# Altium PCB BaseNode.PcbDoc (part 1 of 3)
Units mil, origin at the board's own origin, x right, y up, seen from the top; angles counter-clockwise.
Board outline 2200 x 2870 mil, 2 copper layers (Top Layer, Bottom Layer), stack 65.8 mil thick; 93 components, 79 nets, 344 pads, 79 vias.
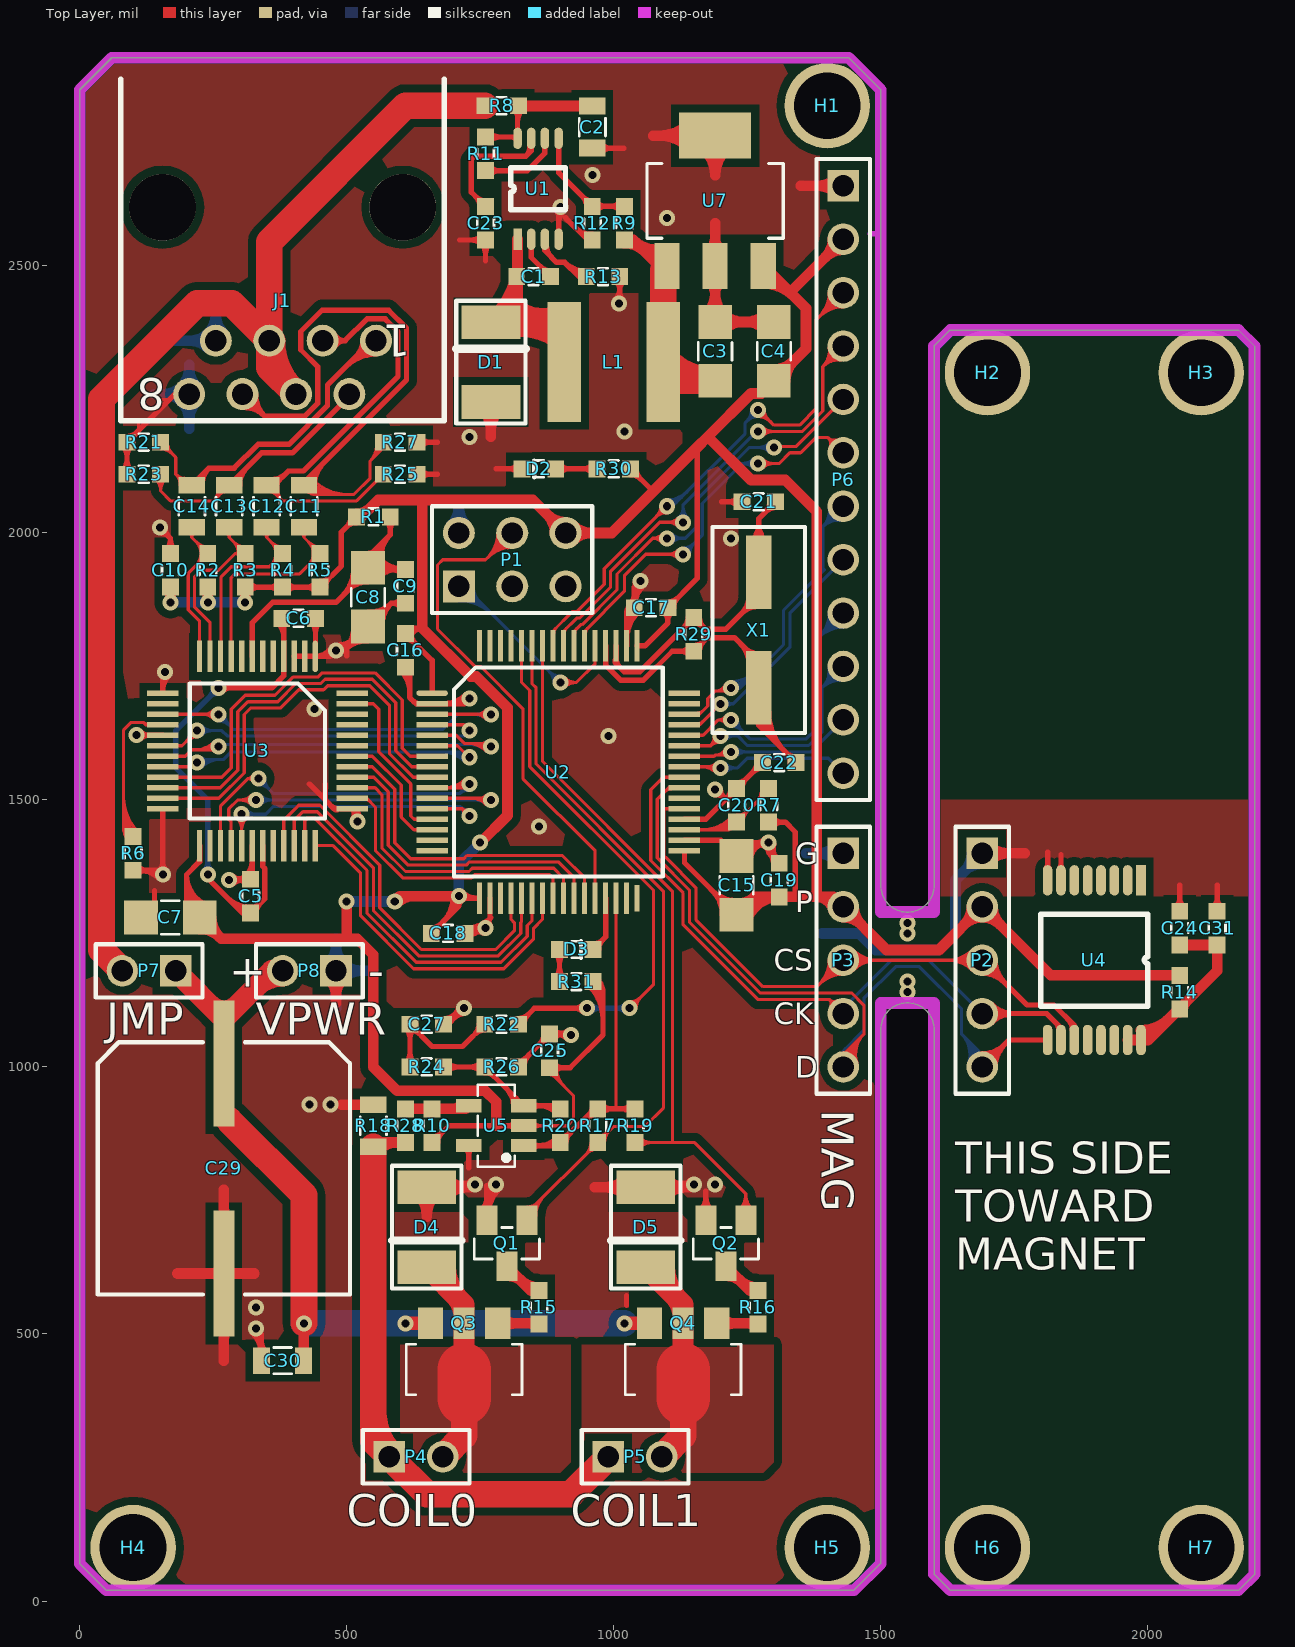
[diagram p0: Top Layer view]
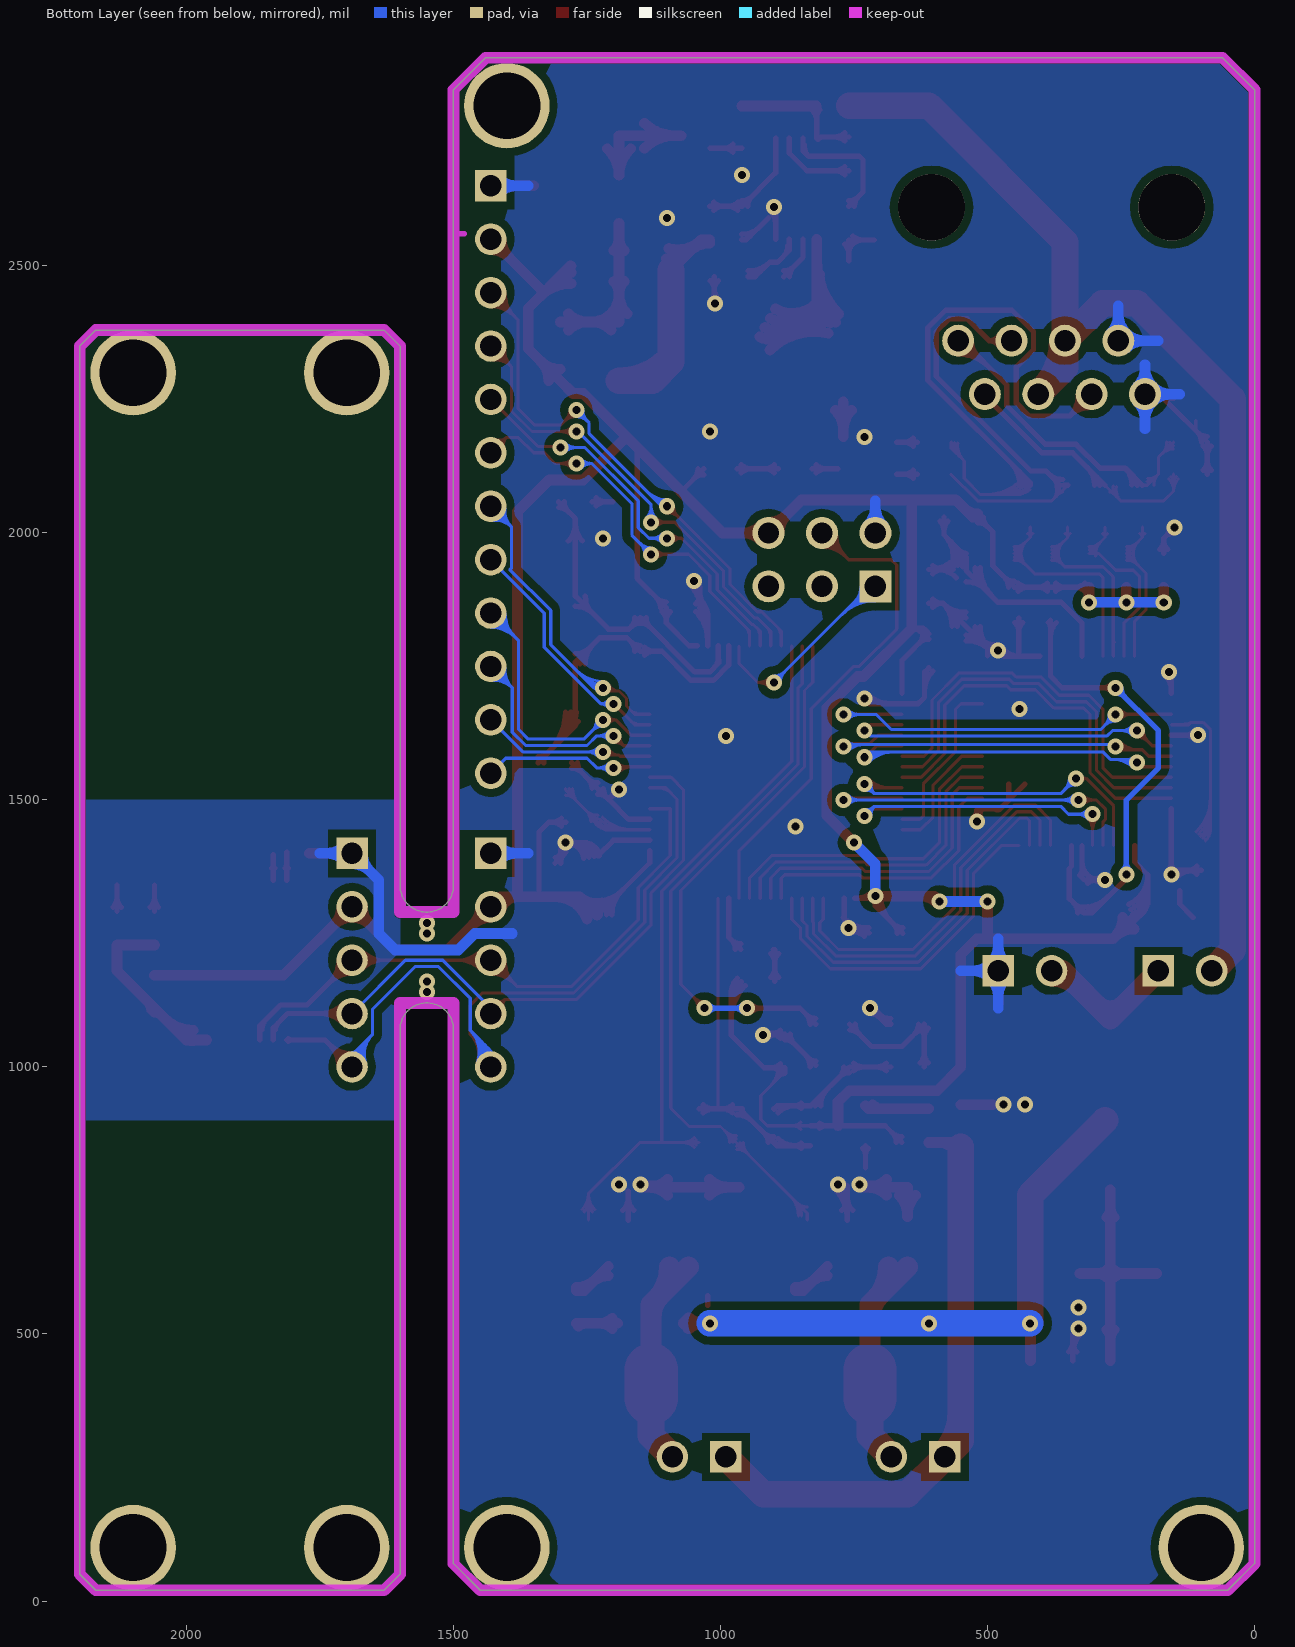
[diagram p1: Bottom Layer view, seen from below]

## Layer stack, top to bottom
Top Layer: signal copper 1.4
Dielectric: core 63, FR-4, Dk 4.8
Bottom Layer: signal copper 1.4

## Board outline
50,20 0,70 0,2830 60,2890 1440,2890 1500,2830 1500,1340 ccw(c1550,1340) 1600,1340 1600,2350 1630,2380 2170,2380 2200,2350 2200,50 2170,20 1630,20 1600,50 1600,1070 ccw(c1550,1070) 1500,1070 1500,70 1450,20

## Design rules (kind name [scope] priority, off if disabled: settings)
AcuteAngle [All] p1: minimum=4.50000000000000E+0001 checktracksonly=FALSE
Clearance KEEPOUT [OnLayer('Keep-Out Layer')] p1: gap=1
Clearance POLY-STUFF [inpoly] p2: gap=15
Clearance [All] p3: gap=6
ComponentClearance [All] p1: gap=1 collisioncheckmode=3 verticalgap=1 showdistances=FALSE
HoleSize [All] p1: absolutevalues=TRUE maxlimit=500 minlimit=10 maxpercent=80.000 minpercent=20.000
MinimumSolderMaskSliver [All] p1: minsoldermaskwidth=3
PolygonConnect PolygonConnect_1 [isvia] p1: connectstyle=Direct reliefconductorwidth=10 reliefentries=4 polygonreliefangle="90 Angle"
PolygonConnect [All] p2: connectstyle=NoConnect reliefconductorwidth=10 reliefentries=4 polygonreliefangle="90 Angle"
RoutingVias [All] p1: holewidth=15 width=30 viastyle="Through Hole" minholewidth=10 minwidth=10 maxholewidth=500 maxwidth=500
SilkscreenOverComponentPads [All] p1: minsilkscreentomaskgap=3
SolderMaskExpansion [All] p1: expansion=2
Width [All] p1: maxlimit=100 minlimit=6 preferedwidth=10 checkconnectedcopper=TRUE
24 further rules are at their usual default settings.

## Components (designator, comment, footprint, x,y, rotation, side; value= is the part's Value field where it differs from the comment)
C1 "0.1uF 25V" 0603 850,2480 r180 top
C2 "1uF 100V" 0805 960,2760 r90 top
C3 "22uF 6.3V" 1206 1190,2340 r270 top
C4 "22uF 6.3V" 1206 1300,2340 r270 top
C5 "2.2uF 10V" 0603 320,1320 r270 top
C6 "2.2uF 10V" 0603 410,1840 r180 top
C7 "22uF 6.3V" 1206 170,1280 r0 top
C8 "22uF 6.3V" 1206 540,1880 r90 top
C9 "0.1uF 25V" 0603 610,1900 r90 top
C10 "0.1uF 25V" 0603 170,1930 r270 top
C11 "33nF 250V" 0805 420,2050 r270 top
C12 "33nF 250V" 0805 350,2050 r270 top
C13 "33nF 250V" 0805 280,2050 r270 top
C14 "33nF 250V" 0805 210,2050 r270 top
C15 "22uF 6.3V" 1206 1230,1340 r270 top
C16 "0.1uF 25V" 0603 610,1780 r90 top
C17 "0.1uF 25V" 0603 1070,1860 r0 top
C18 "0.1uF 25V" 0603 690,1250 r180 top
C19 "0.1uF 25V" 0603 1310,1350 r270 top
C20 "2.2uF 10V" 0603 1230,1490 r270 top
C21 "39pF" 0603 1271.73,2058.27 r0 top
C22 "39pF" 0603 1310,1570 r0 top
C23 "0.1uF 25V" 0603 760,2580 r90 top
C24 "2.2uF 10V" 0603 2060,1260 r270 top
C25 "0.1uF 25V" 0603 880,1030 r270 top
C27 "2.2uF 10V" 0603 650,1080 r180 top
C29 "100uF 80V" "Capacitor 12mm DIA POLAR" 270,810 r90 top
C30 "1uF 100V" 0805 380,450 r0 top
C31 "2.2uF 10V" 0603 2130,1260 r270 top
D1 "CDBA140-G" SMA-DIODE 770,2320 r90 top
D2 "WP113IDT" "0603 - LED" 860,2120 r180 top
D3 "WP113GDT" "0603 - LED" 930,1220 r0 top
D4 "CDBA140-G" SMA-DIODE 650,700 r270 top
D5 "CDBA140-G" SMA-DIODE 1060,700 r270 top
H1 "MOUNT HOLE" MOUNT_HOLE 1400,2800 r0 top
H2 "MOUNT HOLE" MOUNT_HOLE 1700,2300 r0 top
H3 "MOUNT HOLE" MOUNT_HOLE 2100,2300 r0 top
H4 "MOUNT HOLE" MOUNT_HOLE 100,100 r0 top
H5 "MOUNT HOLE" MOUNT_HOLE 1400,100 r0 top
H6 "MOUNT HOLE" MOUNT_HOLE 1700,100 r0 top
H7 "MOUNT HOLE" MOUNT_HOLE 2100,100 r0 top
J1 "SS-6488-NF" SS-6488-NF 380,2610 r180 top
L1 "Inductor" "NR6028 Inductor" 1000,2320 r0 top
P1 "Header 3X2" HDR2X3 710,1900 r0 top
P2 "Header 5" HDR1X5 1690,1400 r270 top
P3 "Header 5" HDR1X5 1430,1400 r270 top
P4 "Header 2" HDR1X2 580,270 r0 top
P5 "Header 2" HDR1X2 990,270 r0 top
P6 "Header 12" HDR1X12 1430,2650 r270 top
P7 "Header 2" HDR1X2 180,1180 r180 top
P8 "Header 2" HDR1X2 480,1180 r180 top
Q1 "NFET" SOT-23 800,670 r180 top
Q2 "NFET" SOT-23 1210,670 r180 top
Q3 "#NAME?" "SOT-89 - PBSS305PX" 720,520 r180 top
Q4 "#NAME?" "SOT-89 - PBSS305PX" 1130,520 r180 top
R1 "LM4041EIM3X-1.2_1" 0603 550,2030 r0 top
R2 "51" 0603 240,1930 r270 top
R3 "51" 0603 310,1930 r270 top
R4 "51" 0603 380,1930 r270 top
R5 "51" 0603 450,1930 r270 top
R6 "6.49K" 0603 100,1400 r90 top
R7 "LM4041EIM3X-1.2_1" 0603 1290,1490 r90 top
R8 "LM4041EIM3X-1.2_1" 0603 790,2800 r0 top
R9 "3.16k" 0603 1020,2580 r270 top
R10 "1meg" 0603 660,890 r270 top
R11 "100k" 0603 760,2710 r90 top
R12 "6.49K" 0603 960,2580 r90 top
R13 "DNP" 0603 980,2480 r180 top
R14 "LM4041EIM3X-1.2_1" 0603 2060,1140 r270 top
R15 "1k" 0603 860,550 r270 top
R16 "1k" 0603 1270,550 r270 top
R17 "10k" 0603 970,890 r90 top
R18 "220m" 0805 550,890 r270 top
R19 "10k" 0603 1040,890 r90 top
R20 "1meg" 0603 900,890 r90 top
R21 "100k" 0603 120,2170 r0 top
R22 "1k" 0603 790,1080 r0 top
R23 "100k" 0603 120,2110 r0 top
R24 "100k" 0603 650,1000 r180 top
R25 "100k" 0603 600,2110 r180 top
R26 "10k" 0603 790,1000 r180 top
R27 "100k" 0603 600,2170 r180 top
R28 "3.16k" 0603 610,890 r270 top
R29 "100k" 0603 1150,1810 r270 top
R30 "51" 0603 1000,2120 r0 top
R31 "51" 0603 930,1160 r0 top
U1 "LM5007MM/NOPB" MSOP-8 820,2550 r90 top
U2 "MCF51CN128CLH" "LQFP-64 10x10mm .5mm pitch" 660,1700 r0 top locked
U3 "KSZ8051MLL" "LQFP-48 7x7mm 0.5mm pitch" 441.1,1768.9 r270 top
U4 "AS5045-ASSU" SSOP-16 1900,1200 r270 top
U5 "MIC7211YM5 TR" SOT-23-5 780,890 r180 top
U7 "TC1262-3.3VDBTR" SOT-223 1100,2500 r0 top
X1 "ECS-250-20-3X-EN-TR" CSM-3X 1271.73,1818.27 r90 top

## Footprints (in the part's own frame and the unit in brackets; to place one, negate y for a bottom-side part, rotate by r counter-clockwise, add the part's x,y. Pads: shape width x height; smd on the part's side, far side on the other; paste and mask are expansions set on the pad)
0603 [mm]
  rect 0.8x0.8 smd: 1(-0.8,0) 2(0.8,0)
  silkscreen extent -0.23,-0.4 0.23,0.4, body extent -0.8,-0.4 0.8,0.4, height 0.45
"0603 - LED" [mm]
  rect 0.8x0.8 smd: A(-0.8,0) K(0.8,0)
  silkscreen extent -0.23,-0.4 0.23,0.4, body extent -0.8,-0.4 0.8,0.4, height 0.45
0805 [mm]
  rect 0.8x1.25 smd: 1(-1,0) 2(1,0)
  silkscreen extent -0.43,-0.63 0.43,0.63, body extent -1,-0.63 1,0.63, height 1.25
1206 [mm]
  rect 1.6x1.6 smd: 1(-1.4,0) 2(1.4,0)
  silkscreen extent -0.43,-0.8 0.43,0.8, body extent -1.6,-0.8 1.6,0.8, height 1.6
"Capacitor 12mm DIA POLAR" [mm]
  rect 6x1 smd: 1(-5,0) 2(5,0)
  silkscreen extent -6,-6 6,6, body extent -6,-6 6,6, height 11
CSM-3X [mm]
  rect 3.5x1.2 smd: 1(-2.75,0) 2(2.75,0)
  silkscreen extent -4.9,-2.2 4.9,2.2
HDR1X2 [mm] "Connector; Header; 2 Position"
  rect 1.5x1.5 hole 1.016: 1(0,0)
  round 1.5 hole 1.016: 2(2.54,0)
  silkscreen extent -1.27,-1.27 3.81,1.27
HDR1X5 [mm] "Connector; Header; 5 Position"
  rect 1.5x1.5 hole 1.016: 1(0,0)
  round 1.5 hole 1.016: 2(2.54,0) 3(5.08,0) 4(7.62,0) 5(10.16,0)
  silkscreen extent -1.27,-1.27 11.43,1.27
HDR1X12 [mm] "Connector; Header; 12 Position"
  rect 1.5x1.5 hole 1.016: 1(0,0)
  round 1.5 hole 1.016: 2(2.54,0) 3(5.08,0) 4(7.62,0) 5(10.16,0) 6(12.7,0) 7(15.24,0) 8(17.78,0) 9(20.32,0) 10(22.86,0) 11(25.4,0) 12(27.94,0)
  silkscreen extent -1.27,-1.27 29.21,1.27
HDR2X3 [mil] "Connector; Header; 3x2 Position"
  rect 60x60 hole 40: 1(0,0)
  round 60 hole 40: 2(0,100) 3(100,0) 4(100,100) 5(200,0) 6(200,100)
  silkscreen extent -50,-50 250,150
"LQFP-48 7x7mm 0.5mm pitch" [mm]
  oval 1.5x0.25 smd: 1(0,0)
  rect 1.5x0.25 smd: 2(0,-0.5) 3(0,-1) 4(0,-1.5) 5(0,-2) 6(0,-2.5) 7(0,-3) 8(0,-3.5) 9(0,-4) 10(0,-4.5) 11(0,-5) 12(0,-5.5) 25(9,-5.5) 26(9,-5) 27(9,-4.5) 28(9,-4) 29(9,-3.5) 30(9,-3) 31(9,-2.5) 32(9,-2) 33(9,-1.5) 34(9,-1) 35(9,-0.5) 36(9,0)
  rect 0.25x1.5 smd: 13(1.75,-7.25) 14(2.25,-7.25) 15(2.75,-7.25) 16(3.25,-7.25) 17(3.75,-7.25) 18(4.25,-7.25) 19(4.75,-7.25) 20(5.25,-7.25) 21(5.75,-7.25) 22(6.25,-7.25) 23(6.75,-7.25) 24(7.25,-7.25) 37(7.25,1.75) 38(6.75,1.75) 39(6.25,1.75) 40(5.75,1.75) 41(5.25,1.75) 42(4.75,1.75) 43(4.25,1.75) 44(3.75,1.75) 45(3.25,1.75) 46(2.75,1.75) 47(2.25,1.75) 48(1.75,1.75)
  silkscreen extent 1.28,-5.96 7.71,0.47
"LQFP-64 10x10mm .5mm pitch" [mm]
  oval 1.5x0.25 smd: 1(0,0)
  rect 1.5x0.25 smd: 2(0,-0.5) 3(0,-1) 4(0,-1.5) 5(0,-2) 6(0,-2.5) 7(0,-3) 8(0,-3.5) 9(0,-4) 10(0,-4.5) 11(0,-5) 12(0,-5.5) 13(0,-6) 14(0,-6.5) 15(0,-7) 16(0,-7.5) 33(12,-7.5) 34(12,-7) 35(12,-6.5) 36(12,-6) 37(12,-5.5) 38(12,-5) 39(12,-4.5) 40(12,-4) 41(12,-3.5) 42(12,-3) 43(12,-2.5) 44(12,-2) 45(12,-1.5) 46(12,-1) 47(12,-0.5) 48(12,0)
  rect 0.25x1.5 smd: 17(2.25,-9.75) 18(2.75,-9.75) 19(3.25,-9.75) 20(3.75,-9.75) 21(4.25,-9.75) 22(4.75,-9.75) 23(5.25,-9.75) 24(5.75,-9.75) 25(6.25,-9.75) 26(6.75,-9.75) 27(7.25,-9.75) 28(7.75,-9.75) 29(8.25,-9.75) 30(8.75,-9.75) 31(9.25,-9.75) 49(9.75,2.25) 50(9.25,2.25) 51(8.75,2.25) 52(8.25,2.25) 53(7.75,2.25) 54(7.25,2.25) 55(6.75,2.25) 56(6.25,2.25) 57(5.75,2.25) 58(5.25,2.25) 59(4.75,2.25) 60(4.25,2.25) 61(3.75,2.25) 62(3.25,2.25) 63(2.75,2.25) 64(2.25,2.25)
  rect 0.25x1.27 smd: 32(9.75,-9.75)
  silkscreen extent 1.03,-8.71 10.96,1.22, body extent 1,-8.75 11,1.25, height 1
MOUNT_HOLE [mil]
  round 160 hole 125: 0(0,0)
MSOP-8 [mil]
  rect 40x16 smd: 1(0,0)
  oval 40x16 smd: 2(0,-25.6) 3(0,-51.2) 4(0,-76.8) 5(189,-76.8) 6(189,-51.2) 7(189,-25.6) 8(189,0)
  silkscreen extent 55,-90 134,13
"NR6028 Inductor" [mm]
  rect 1.6x5.7 smd: 1(-2.35,0) 2(2.35,0)
SMA-DIODE [mm]
  rect 1.6x2.8 smd: A(-1.9,0) K(1.9,0)
  silkscreen extent -2.92,-1.65 2.92,1.65
SOT-23 [mm] "SOT-23"
  rect 1x1.4 smd: 1(-0.95,-1.1) 2(0.95,-1.1) 3(0,1.1)
  silkscreen extent -1.55,-0.75 1.55,0.75, body extent -1.55,-1.35 1.55,1.35, height 1.3
SOT-23-5 [mm] "SOT23, 5-Leads, Body 3.1x3.0mm (max), Pitch 0.95mm, IPC High Density"
  rect 1.22x0.62 smd: 1(-1.31,0.95) 2(-1.31,0) 3(-1.31,-0.95) 4(1.31,-0.95) 5(1.31,0.95)
  silkscreen extent -0.87,-1.95 0.87,1.95, body extent -1.4,-1.95 1.4,1.95, height 1
"SOT-89 - PBSS305PX" [mm] "SOT-89"
  rect 1.2x1.5 smd: 1(1.6,0) 3(-1.6,0)
  rect 1x1.5 smd: 2(0,0)
  Top Layer lines w1: 0,1.778 0,0
  Top Layer lines w2.54: 0,3.556 0,2.2
  silkscreen extent -2.75,1 2.75,3.4, body extent -2.75,0 2.75,4.4, height 1.3
SOT-223 [mil] "SOT-223"
  rect 135x86 smd: 0(90,244)
  rect 47x86 smd: 1(0,0) 2(90,0) 3(180,0)
  silkscreen extent -38,52 218,192, body extent -38,0 218,244, height 51
SS-6488-NF [mil] "RJ45"
  round 125 hole 125: 0(-225,0) 0(225,0)
  round 60 hole 40: 1(-175,250) 2(-125,350) 3(-75,250) 4(-25,350) 5(25,250) 6(75,350) 7(125,250) 8(175,350)
  silkscreen extent -303,-240 303,400, body extent -300,-407 300,407, height 505
SSOP-16 [mil]
  rect 57x18 smd: 1(-149.5,87.5)
  oval 57x18 smd: 2(-149.5,62.5) 3(-149.5,37.5) 4(-149.5,12.5) 5(-149.5,-12.5) 6(-149.5,-37.5) 7(-149.5,-62.5) 8(-149.5,-87.5) 9(149.5,-87.5) 10(149.5,-62.5) 11(149.5,-37.5) 12(149.5,-12.5) 13(149.5,12.5) 14(149.5,37.5) 15(149.5,62.5) 16(149.5,87.5)
  silkscreen extent -86,-100 86,100, body extent -104,-122 104,122, height 79

## Part data
C1 C2 C3 C4 C5 C6 C7 C8 C9 C10 C11 C12 C13 C14 C15 C16 C17 C18 C19 C20 C21 C22 C23 C24 C25 C27 C29 C30 C31: library part Capacitor, "Capacitor"
D1 D4 D5: "DIODE SCHOTTKY 40V 1A SMA"
D2: "LED RECT 2X5MM 625NM RED DIFF"
D3: "LED RECT 2X5MM 568NM GRN DIFF"
J1: "CONN 8-8 MOD JACK"
P1: "Header, 3-Pin, Dual row"
P2 P3: "Header, 5-Pin"
P4 P5 P7 P8: "Header, 2-Pin"
P6: "Header, 12-Pin"
Q1 Q2: library part BSS123, "FET N-CH 100V 170MA SOT-23"
Q3 Q4: library part PBSS305PX,115, "TRANS PNP 80V 4A SOT89"
R1 R7 R8 R14: "Ferrite"
R2 R3 R4 R5 R6 R9 R10 R11 R12 R13 R15 R16 R17 R18 R19 R20 R21 R22 R23 R24 R25 R26 R27 R28 R29 R30 R31: library part Resistor, "Resistor"
U1: "BUCK ADJ .5A 8MSOP"
U2: "MCU Coldfire w/ Ethernet"
U3: "Ethernet PHY MII"
U4: "IC ENCODER PROG 12-BIT 16-SSOP"
U5: library part "MIC7221YM5 TR", "IC COMPARATOR R-R SOT-23-5"
U7: "Regulator IC CMOS LDO 3.3V 500MA SOT223-3"
X1: "CRYSTAL 25.00000 MHZ 20PF SMD"

## Via types
v1: diameter 30, hole 15, Top Layer to Bottom Layer, tented top, 79 vias

## Nets (pads, with @x,y where several pads share a name; then routed paths per layer and width w, separated by ;. In a path a pad name is that pad's centre, name@x,y a point inside that pad or via, vN(x,y) a via of type N, cw(c..) or ccw(c..) an arc to the next point about the centre after c; other vN are vias at no path point)
+1.2V: C5.2 C6.2 U3.4 U3.31 | length 1171
  Top Layer w10: v1(240,1360) 240,1353.23 304.73,1288.5 C5.2@320,1288.5 346.75,1315.25 346.75,1371.8 342.68,1375.87 U3.31@342.68,1414.57 ; v1(260,1710) 360,1710 382.05,1732.05 U3.4@382.05,1768.9 C6.2@382.05,1836.46 ; v1@267.07,1702.93 cw(c284.14,1685.86) 284.14,1710 cw(c284.14,1734.14) v1@267.07,1717.07 ; 275.58,1317.65 ccw(c320,1362.07) 320,1299.25 ccw(c320,1325.2) 338.35,1306.85 ccw(c356.7,1288.5) C5.2@330.75,1288.5 ; 292.65,1300.58 ccw(c320,1327.93) C5.2@320,1289.25 ; C6.2@370.9,1832.4 cw(c344,1805.5) 382.05,1805.5 ; 382.05,1822.61 cw(c395.9,1822.61) C6.2@386.1,1832.4
  Bottom Layer w10: v1@232.93,1367.07 ccw(c215.86,1384.14) 240,1384.14 ccw(c264.14,1384.14) v1@247.07,1367.07 ; v1(240,1360) 240,1500 180,1560 180,1630 v1(260,1710) ; v1@250,1710 cw(c225.86,1710) 242.93,1692.93 cw(c260,1675.86) v1@260,1700
+3.3V: C4.2 C7.2 C10.2 C15.2 C16.2 C17.2 C18.2 C19.2 C25.2 P1.6 P2.2 P3.2 P6.2 R1.1 R2.2 R3.2 R4.2 R5.2 R7.1 R10.2 R14.1 R30.2 R31.2 U2.1 U2.17 U2.33 U2.49 U3.25 U5.2 U7.3 | length 10302.6
  Top Layer w6: U5.2@831.57,890 912.73,890 924.75,902.02 924.75,946.24 C25.2@880,990.99 ; U5.2@849.89,883.49 cw(c865.61,867.78) 865.61,890 cw(c865.61,912.22) U5.2@849.89,896.51 ; C25.2@880,985.76 cw(c880,973.11) 888.94,982.05 ; C25.2@886.75,998.5 ccw(c921.17,998.5) 896.83,974.16 ; C25.2@892.75,998.5 ccw(c941.66,998.5) 907.07,963.92
  Top Layer w10: 200,1313.5 ccw(c240.27,1313.5) C7.2@223.67,1276.81 ; 200,1329 ccw(c247.28,1329) C7.2@227.8,1285.92 ; 200,1344.5 ccw(c254.29,1344.5) C7.2@231.92,1295.03 ; 220.89,1380.89 ccw(c211.81,1389.96) U3.25@224.65,1389.96 ; U3.25@224.57,1414.57 224.57,1384.57 200,1360 ; C7.2@225.12,1280 200,1305.12 200,1360 ; C7.2@236.04,1304.14 cw(c261.31,1360) 200,1360 ; R3.2@310,1898.5 R4.2@380,1898.5 R5.2@450,1898.5 490,1938.5 490,2001.5 R1.1@518.5,2030 ; R3.2@317.6,1890.9 cw(c335.95,1872.56) 335.95,1898.5 cw(c335.95,1924.45) R3.2@317.6,1906.1 ; R4.2@372.4,1890.9 ccw(c354.05,1872.56) 354.05,1898.5 ccw(c354.05,1924.45) R4.2@372.4,1906.1 ; R4.2@387.6,1890.9 cw(c405.95,1872.56) 405.95,1898.5 cw(c405.95,1924.45) R4.2@387.6,1906.1 ; R5.2@442.4,1890.9 ccw(c424.05,1872.56) 424.05,1898.5 ccw(c424.05,1924.45) R5.2@442.4,1906.1 ; R5.2@450,1909.25 ccw(c450,1935.2) 468.35,1916.85 ccw(c486.7,1898.5) R5.2@460.75,1898.5 ; R1.1@507.76,2030 cw(c481.81,2030) 500.16,2011.65 cw(c518.5,1993.3) R1.1@518.5,2019.25 ; C16.2@610,1800.75 cw(c610,1774.8) 628.35,1793.15 cw(c646.7,1811.5) C16.2@620.75,1811.5 ; C16.2@610.68,1811.19 cw(c626.35,1804.22) 626.35,1821.37 ; C16.2@619.82,1807.13 cw(c641.75,1797.37) 641.75,1821.37 619.87,1821.37 C16.2@610,1811.5 660,1761.5 U2.1@660,1700 ; C18.2@658.5,1250 710,1301.5 ; C18.2@658.5,1260.75 ccw(c658.5,1286.7) 676.85,1268.35 ccw(c695.2,1250) C18.2@669.25,1250 ; R10.2@660,858.5 691.5,890 780,890 U5.2@831.57,890 ; R10.2@660,869.25 ccw(c660,895.2) 678.35,876.85 ccw(c696.7,858.5) R10.2@670.75,858.5 ; 679.84,1271.34 ccw(c631.19,1320) v1@700,1320 ; 696.92,1288.41 ccw(c665.33,1320) v1(710,1320) v1@710,1316.14 ; v1@704.52,1311.63 cw(c697.88,1301.5) 710,1301.5 ; v1@715.48,1311.63 ccw(c722.12,1301.5) 710,1301.5 ; v1@717.07,1312.93 cw(c724.83,1305.17) 724.83,1316.14 ; v1@717.07,1327.07 ccw(c743.46,1353.46) 743.46,1316.14 ; U2.17@748.58,1316.14 v1@710,1316.14 ; U5.2@814.67,884.91 ccw(c802.37,872.61) 802.37,890 ccw(c802.37,907.39) U5.2@814.67,895.09 ; C25.2@880,988.55 880,990.99 C25.2@880,998.5 918.5,998.5 980,1060 980,1141.5 R31.2@961.5,1160 ; C25.2@887.6,990.9 cw(c905.95,972.56) 905.95,998.5 cw(c905.95,1024.45) C25.2@887.6,1006.1 ; R31.2@953.9,1152.4 cw(c890.88,1089.38) 980,1089.38 ; R31.2@960.97,1159.47 cw(c915.02,1113.52) 980,1113.52 ; R31.2@961.5,1149.25 cw(c961.5,1123.3) 979.84,1141.65 cw(c998.19,1160) R31.2@972.24,1160 ; R31.2@968.04,1166.54 cw(c939.16,1137.66) 980,1137.66 ; R30.2@1031.5,2109.25 cw(c1031.5,2083.3) 1049.84,2101.65 cw(c1068.19,2120) R30.2@1042.24,2120 ; R30.2@1031.5,2120 1071.5,2080 ; U2.49@1043.86,1788.58 1058.58,1788.58 1101.5,1831.5 C17.2@1101.5,1860 1156.16,1914.66 1156.16,2160 ; C17.2@1093.9,1852.4 cw(c1075.55,1834.05) 1101.5,1834.05 cw(c1127.44,1834.05) C17.2@1109.1,1852.4 ; C17.2@1101.5,1870.75 ccw(c1101.5,1896.7) 1119.84,1878.35 ccw(c1138.19,1860) C17.2@1112.24,1860 ; U2.33@1132.44,1404.72 1132.44,1382.44 C15.2@1230,1284.88 ; C15.2@1203.5,1284.88 ccw(c1139.54,1284.88) 1184.77,1330.11 ccw(c1230,1375.34) C15.2@1230,1311.38 ; C15.2@1213.5,1284.88 ccw(c1173.68,1284.88) 1201.84,1313.04 ccw(c1230,1341.2) C15.2@1230,1301.38 ; R7.1@1290,1458.5 1321.5,1458.5 1340,1440 1340,1318.5 ; R7.1@1297.6,1450.9 cw(c1315.95,1432.56) 1315.95,1458.5 cw(c1315.95,1484.45) R7.1@1297.6,1466.1 ; 710,1301.5 v1@710,1316.14
  Top Layer w20: v1(170,1870) C10.2@170,1898.5 ; C7.2@225.12,1258.5 cw(c225.12,1206.61) 261.81,1243.3 cw(c298.51,1280) C7.2@246.61,1280 ; C7.2@225.12,1280 265.12,1240 500,1240 ; v1(240,1870) R2.2@240,1898.5 ; v1(310,1870) R3.2@310,1898.5 ; v1(500,1310) 500,1240 ; R1.1@518.5,2030 527.37,2030 559.12,2061.75 640,2061.75 ; R1.1@518.5,2035.75 ccw(c518.5,2071.04) 543.46,2046.08 ; v1(590,1310) 600,1320 v1(710,1320) ; v1@593.54,1306.46 cw(c626.21,1273.79) 626.21,1320 ; v1(750,1420) 801,1471 801,1672.84 742.79,1731.06 732.06,1731.06 641.75,1821.37 641.75,2060 640,2061.75 ; 780,890 780,934.67 759.07,955.61 594.39,955.61 550,1000 550,1210 520,1240 500,1240 ; P1.6@890,2000 ccw(c841.72,2000) 875.86,2034.14 ccw(c910,2068.28) P1.6@910,2020 ; P1.6@924.14,1985.86 cw(c958.28,1951.72) 958.28,2000 cw(c958.28,2048.28) P1.6@924.14,2014.14 ; C15.2@1230,1284.88 1263.62,1318.5 ; C15.2@1231.37,1306.33 ccw(c1234.04,1348.08) 1263.62,1318.5 ; C15.2@1231.4,1284.35 cw(c1280.97,1265.45) 1280.97,1318.5 ; C15.2@1250.09,1277.23 cw(c1310,1254.39) C19.2@1310,1318.5 ; C15.2@1251.45,1286.25 cw(c1293.2,1288.92) 1263.62,1318.5 ; U7.3@1280,2467 cw(c1280,2385.55) 1337.59,2443.14 ; U7.3@1280,2487 cw(c1280,2453.83) U7.3@1303.45,2477.29 ; U7.3@1280,2500 1280.74,2500 1360,2420.74 1360,2344.88 C4.2@1300,2284.88 1276.12,2261 1257.16,2261 1176.16,2180 ; C4.2@1300,2306.38 ccw(c1300,2358.27) 1336.7,2321.58 ccw(c1373.39,2284.88) C4.2@1321.5,2284.88 ; 1330.74,2450.74 P6.2@1430,2550 ; 1406.29,1318.5 cw(c1406.29,1293.43) P3.2@1430.46,1300.13 ; P6.2@1410.47,2550 cw(c1363.33,2550) 1396.66,2516.66 cw(c1430,2483.33) P6.2@1430,2530.47 ; P3.2@1411.18,1294.79 ccw(c1380,1286.15) 1380,1318.5 ; P3.2@1430,1280.47 cw(c1430,1233.33) 1463.34,1266.66 cw(c1496.67,1300) P3.2@1449.53,1300 ; P2.2@1670.47,1300 cw(c1623.33,1300) 1656.66,1266.66 cw(c1690,1233.33) 1690,1280.47 cw(c1690,1233.33) 1723.34,1266.66 cw(c1756.67,1300) P2.2@1709.53,1300 ; R14.1@2060,1171.5 1818.5,1171.5 P2.2@1690,1300 1609,1219 1511,1219 P3.2@1430,1300 1411.5,1318.5 1380,1318.5 ; 640,2061.75 848.25,2061.75 P1.6@910,2000 996.16,2000 1156.16,2160 1176.16,2180 ; 1176.16,2180 1257.16,2099 1321,2099 1380,2040 1380,1318.5 ; 1263.62,1318.5 C19.2@1310,1318.5 ; C19.2@1310,1318.5 1340,1318.5 1380,1318.5
  Bottom Layer w20: v1(170,1870) v1(240,1870) v1(310,1870) ; v1(500,1310) v1(590,1310) ; v1(710,1320) 710,1380 v1(750,1420)
+3.7V: C3.2 L1.2 R9.2 U7.1 | length 658.7
  Top Layer w20: R9.2@1020,2542.76 cw(c1020,2488.96) 1058.04,2527 ; R9.2@1020,2548.5 1036.54,2548.5 ; 1060.96,2524.08 ccw(c1090.7,2553.83) U7.1@1101.7,2513.23 ; U7.1@1085.37,2499.67 ccw(c1101.11,2515.4) U7.1@1106.93,2493.92 ; U7.1@1092.52,2492.52 1036.54,2548.5 ; U7.1@1096.47,2532.53 cw(c1080.29,2592.26) 1036.54,2548.5
  Top Layer w50: U7.1@1092.52,2492.52 L1.2@1092.52,2320 1127.64,2284.88 C3.2@1190,2284.88 cw(c1190,2413.36) L1.2@1097.21,2324.49
AUTONEG_EN: U2.14 U3.42 | length 242.2
  Top Layer w6: U3.42@510,1581.89 548.11,1581.89 602,1528 602,1468 625.91,1444.09 U2.14@660,1444.09
AUX_ADC_0: P6.12 U2.41 | length 422.7
  Top Layer w6: U2.41@1132.44,1562.2 v1@1197.8,1562.2 ; 1165.71,1562.2 cw(c1165.71,1525.71) v1@1191.51,1551.51 ; 1176.35,1562.2 ccw(c1176.35,1583.65) v1@1191.51,1568.49 ; 1180.19,1562.21 cw(c1180.19,1540.19) v1@1195.76,1555.76
  Bottom Layer w6: v1(1200,1560) 1232,1560 1250,1578 1402,1578 P6.12@1430,1550 ; v1@1208.49,1551.51 cw(c1228.97,1531.03) 1228.97,1560 cw(c1228.97,1588.97) v1@1208.49,1568.49
AUX_ADC_1: P6.11 U2.42 | length 419.6
  Top Layer w6: U2.42@1132.44,1581.89 1187.95,1581.89 1190.06,1584 ; 1200.04,1584 ccw(c1200.04,1600.6) v1@1214.7,1592.81 ; 1205.51,1584 cw(c1205.51,1575.51) v1@1211.51,1581.51 ; v1@1209.4,1595.63 cw(c1190.06,1605.9) 1190.06,1584 ; v1(1220,1590) 1214,1584 1190.06,1584
  Bottom Layer w6: v1(1220,1590) 1370,1590 P6.11@1430,1650 ; v1@1228.49,1581.51 cw(c1248.97,1561.03) 1248.97,1590 cw(c1248.97,1618.97) v1@1228.49,1598.49
AUX_ADC_2: P6.10 U2.43 | length 698.1
  Top Layer w6: U2.43@1132.44,1601.57 1181.58,1601.57 ; v1@1188.04,1619.07 cw(c1165.82,1617.34) 1181.58,1601.58 ; v1@1199.07,1608.04 ccw(c1197.34,1585.82) 1181.58,1601.58 ; v1(1200,1620) 1181.58,1601.57
  Bottom Layer w6: v1(1200,1620) 1232,1620 1250,1602 1365.03,1602 1390,1626.97 1390,1710 ; v1@1208.49,1611.51 cw(c1228.97,1591.03) 1228.97,1620 cw(c1228.97,1648.97) v1@1208.49,1628.49 ; P6.10@1403.58,1747.57 cw(c1356.74,1743.27) 1390,1710 ; P6.10@1409.56,1748.12 cw(c1373.31,1744.79) 1399.05,1719.05 cw(c1424.79,1693.31) P6.10@1428.12,1729.56 ; P6.10@1415.53,1748.67 cw(c1389.88,1746.31) 1408.1,1728.1 cw(c1426.31,1709.88) P6.10@1428.67,1735.53 ; P6.10@1427.57,1723.58 ccw(c1423.27,1676.74) 1390,1710 ; P6.10@1430,1750 1390,1710
AUX_ADC_3: P6.9 U2.44 | length 831.6
  Top Layer w6: U2.44@1132.44,1621.26 1167.32,1621.26 1196.06,1650 ; v1@1210.39,1642.82 ccw(c1196.06,1632.12) 1196.06,1650 ; v1@1210.39,1657.18 cw(c1196.06,1667.88) 1196.06,1650 ; v1(1220,1650) 1196.06,1650
  Bottom Layer w6: v1@1220,1638 cw(c1220,1609.03) 1240.49,1629.51 cw(c1260.97,1650) v1@1232,1650 ; v1(1220,1650) 1256,1614 1360,1614 1378,1632 1378,1798 P6.9@1430,1850 ; P6.9@1403.47,1850 cw(c1339.43,1850) 1384.71,1804.71 cw(c1430,1759.43) P6.9@1430,1823.47 ; P6.9@1409.47,1850 cw(c1359.91,1850) 1394.96,1814.96 cw(c1430,1779.91) P6.9@1430,1829.47 ; P6.9@1415.47,1850 cw(c1380.4,1850) 1405.2,1825.2 cw(c1430,1800.4) P6.9@1430,1835.47
BKGD: P1.1 U2.53 | length 724.2
  Top Layer w6: v1(900,1720) 930,1720 965.12,1755.12 U2.53@965.12,1788.58 ; v1@908.49,1711.51 cw(c928.97,1691.03) 928.97,1720 cw(c928.97,1748.97) v1@908.49,1728.49
  Bottom Layer w6: P1.1@710,1873 cw(c710,1783.67) 773.16,1846.84 ; P1.1@710,1879 cw(c710,1804.16) 762.92,1857.08 ; P1.1@710,1885 cw(c710,1824.64) 752.68,1867.32 ; P1.1@710,1891 cw(c710,1845.13) 742.44,1877.56 ; P1.1@720,1900 v1(900,1720) ; P1.1@731,1900 ccw(c757.56,1900) P1.1@738.78,1881.22 ; P1.1@737,1900 ccw(c778.04,1900) 749.02,1870.98 ; v1@888,1720 ccw(c859.03,1720) 879.51,1740.49 ccw(c900,1760.97) v1@900,1732
COIL0+: D4.K P4.2 Q3.2 | length 376
  Top Layer w39.37: D4.K@650,625.2 720,555.2 Q3.2@720,520 ; D4.K@685.43,625.2 ccw(c770.98,625.2) 710.49,564.71 ; 702.07,573.13 cw(c658.79,529.84) Q3.2@720,529.84
  Top Layer w50: P4.2@680,270 720,310 720,380
COIL0_I\N\H\: Q1.1 R17.1 U2.59 | length 1557.7
  Top Layer w6: Q1.1@837.4,713.31 837.4,725.91 R17.1@970,858.5 1000,888.5 1058.5,888.5 1093.03,923.03 1093.03,1329.08 854.69,1567.41 854.69,1710 847.01,1717.68 U2.59@847.01,1788.58 ; Q1.1@837.4,737.87 ccw(c837.4,766.74) 857.82,746.32 ; Q1.1@848.09,721.18 cw(c885.29,721.18) 858.98,747.49 ; Q1.1@854.09,721.18 cw(c905.77,721.18) 869.23,757.73 ; R17.1@957.25,858.5 cw(c926.48,858.5) 948.24,836.74 cw(c970,814.98) R17.1@970,845.76 ; R17.1@963.25,858.5 cw(c946.96,858.5) 958.48,846.98 cw(c970,835.46) R17.1@970,851.76 ; R17.1@970,865.25 ccw(c970,881.54) 981.52,870.02 ccw(c993.04,858.5) R17.1@976.75,858.5 ; R17.1@970,871.25 ccw(c970,902.03) 991.76,880.27 ccw(c1013.52,858.5) R17.1@982.75,858.5
COIL1+: D5.K P5.2 Q4.2 | length 376
  Top Layer w39.37: D5.K@1060,625.2 1130,555.2 Q4.2@1130,520 ; D5.K@1095.43,625.2 ccw(c1180.98,625.2) 1120.49,564.71 ; 1112.07,573.13 cw(c1068.79,529.84) Q4.2@1130,529.84
  Top Layer w50: P5.2@1090,270 1130,310 1130,380
COIL1_I\N\H\: Q2.1 R19.1 U2.58 | length 1505
  Top Layer w6: U2.58@866.69,1788.58 866.69,1572.38 1110,1329.08 1110,858.5 ; R19.1@1040,858.5 1151.5,858.5 1247.4,762.6 Q2.1@1247.4,713.31 ; R19.1@1044.77,853.73 cw(c1056.29,842.21) 1056.29,858.5 cw(c1056.29,874.79) R19.1@1044.77,863.28 ; R19.1@1049.01,849.49 cw(c1070.78,827.73) 1070.78,858.5 cw(c1070.78,889.28) R19.1@1049.01,867.52 ; Q2.1@1235.6,732.98 ccw(c1207.12,761.46) 1247.4,761.46 ccw(c1287.68,761.46) Q2.1@1259.2,732.98 ; Q2.1@1239.85,728.74 ccw(c1221.61,746.98) 1247.4,746.98 ccw(c1273.2,746.98) Q2.1@1254.96,728.74
COIL-: P4.1 P5.1 R18.2 R28.2 | length 1245.4
  Top Layer w20: R18.2@550,850.63 557.87,858.5 R28.2@610,858.5 ; R18.2@562.92,846.57 cw(c591.74,817.74) 591.74,858.5
  Top Layer w50: 550,353.36 ccw(c663.36,353.36) P4.1@583.2,273.2 ; R18.2@550,850.63 550,300 P4.1@580,270 650,200 920,200 P5.1@990,270
COIL_CTL: R22.2 U2.60 | length 1220.5
  Top Layer w6: U2.60@827.32,1788.58 827.32,1720.4 842.69,1705.03 842.69,1562.44 1074.62,1330.52 1074.62,1154.62 v1(1030,1110) ; v1@1030,1122 ccw(c1030,1150.97) 1050.49,1130.49 ccw(c1070.97,1110) v1@1042,1110
  Top Layer w10: R22.2@821.5,1080 851.5,1110 v1(950,1110) ; R22.2@821.5,1090.75 ccw(c821.5,1116.7) 839.84,1098.35 ccw(c858.19,1080) R22.2@832.24,1080 ; v1@942.93,1102.93 ccw(c925.86,1085.86) 925.86,1110 ccw(c925.86,1134.14) v1@942.93,1117.07
  Bottom Layer w10: v1(950,1110) v1(1030,1110) ; v1@957.07,1102.93 cw(c974.14,1085.86) 974.14,1110 cw(c974.14,1134.14) v1@957.07,1117.07 ; v1@1022.93,1102.93 ccw(c1005.86,1085.86) 1005.86,1110 ccw(c1005.86,1134.14) v1@1022.93,1117.07
COIL_FB: R17.2 R19.2 R20.1 U2.30 U5.1 | length 874.9
  Top Layer w6: 1004.49,922.01 U2.30@1004.49,1316.14
  Top Layer w10: U5.1@831.57,852.6 895.13,852.6 964.02,921.5 R17.2@970,921.5 R19.2@1040,921.5 ; U5.1@848.48,847.5 cw(c860.78,835.2) 860.78,852.6 cw(c860.78,869.99) U5.1@848.48,857.69 ; 859.79,852.6 ccw(c859.79,898.71) R20.1@892.4,866.1 ; 883.94,852.6 ccw(c883.94,874.57) R20.1@899.47,859.03 ; R20.1@900,869.25 ccw(c900,897.69) 920.11,877.58 ; R20.1@910.75,858.5 cw(c934.21,858.5) 917.62,875.09 ; 941.45,898.92 cw(c970,870.37) R17.2@970,910.75 ; R17.2@955.88,913.35 ccw(c947.73,921.5) R17.2@959.25,921.5 ; R17.2@977.6,913.9 cw(c995.95,895.55) 995.95,921.5 cw(c995.95,947.44) R17.2@977.6,929.1 ; R19.2@1032.4,913.9 ccw(c1014.05,895.55) 1014.05,921.5 ccw(c1014.05,947.44) R19.2@1032.4,929.1
COL: U2.26 U3.40 | length 595.4
  Top Layer w6: U3.40@510,1542.52 550.51,1542.52 578,1515.03 578,1415.03 615.03,1378 724.06,1378 730.06,1384 896,1384 925.75,1354.25 U2.26@925.75,1316.14
CRS: U2.27 U3.41 | length 623.4
  Top Layer w6: U3.41@510,1562.2 547.8,1562.2 590,1520 590,1420 620,1390 719.09,1390 725.09,1396 904,1396 945.43,1354.57 U2.27@945.43,1316.14
EXTAL: C21.2 R29.1 U2.51 X1.2 | length 861.7
  Top Layer w10: U2.51@1004.41,1763.98 ccw(c1024.65,1763.98) 1010.34,1749.66 ; U2.51@1004.43,1764.03 ccw(c1008.78,1759.8) 1004.49,1755.51 ; U2.51@1004.49,1788.58 1004.49,1755.51 ; R29.1@1139.25,1841.5 cw(c1113.3,1841.5) 1131.65,1823.15 cw(c1150,1804.8) 1150,1830.75 cw(c1150,1804.8) 1168.35,1823.15 cw(c1186.7,1841.5) R29.1@1160.75,1841.5 ; 1239.14,1849.14 cw(c1271.73,1816.54) X1.2@1271.73,1862.64 ; 1240.28,1850.28 ccw(c1209.29,1881.26) X1.2@1253.11,1881.26 ; X1.2@1258.56,1984.98 ccw(c1226.77,2016.77) 1271.73,2016.77 ccw(c1316.69,2016.77) X1.2@1284.9,1984.98 ; C21.2@1292.48,2058.27 cw(c1266.53,2058.27) 1284.88,2039.92 cw(c1303.23,2021.57) C21.2@1303.23,2047.52 ; C21.2@1303.23,2058.27 1271.73,2026.77 X1.2@1271.73,1926.54 1271.73,1881.73 1210,1820 1171.5,1820 R29.1@1150,1841.5 1048.5,1740 1020,1740 1004.49,1755.51